# Altium PCB PCB.PcbDoc
Units mm, origin at the board's own origin, x right, y up, seen from the top; angles counter-clockwise.
Board outline 29.59 x 14.22 mm, 2 copper layers (Top Layer, Bottom Layer); 11 components, 11 nets, 48 pads, 8 vias.
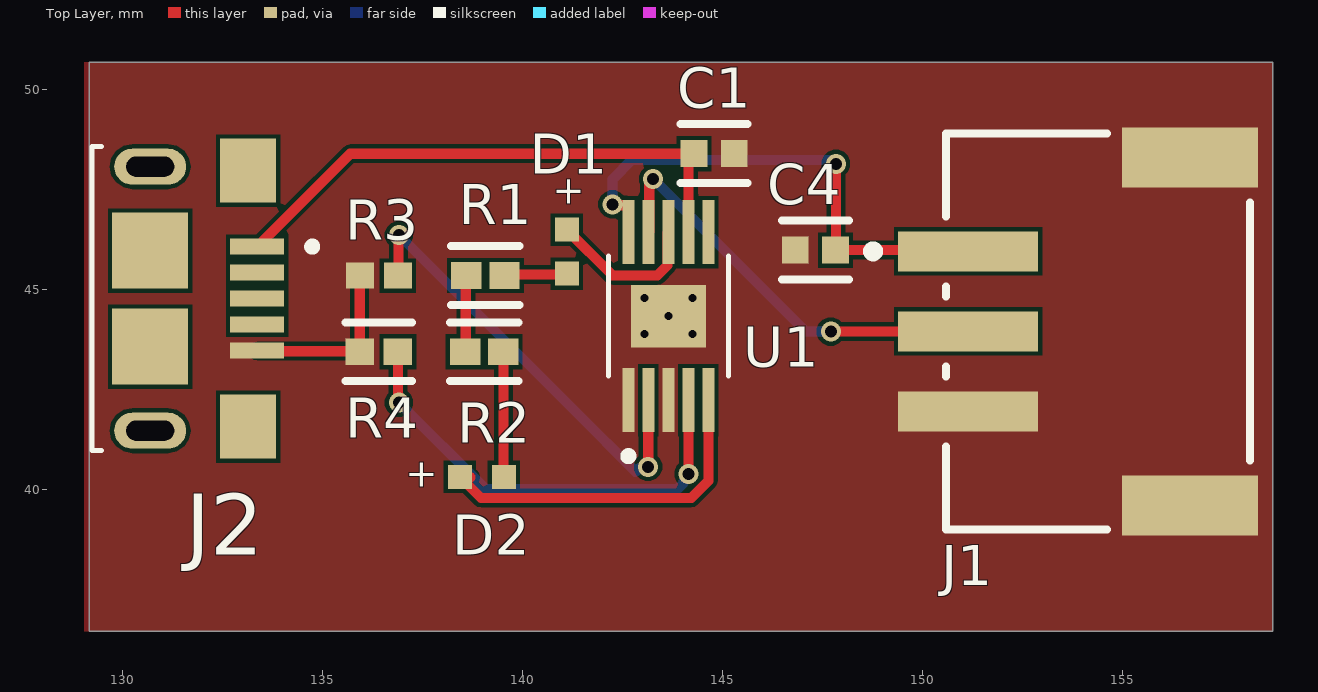
[diagram p0: Top Layer view]
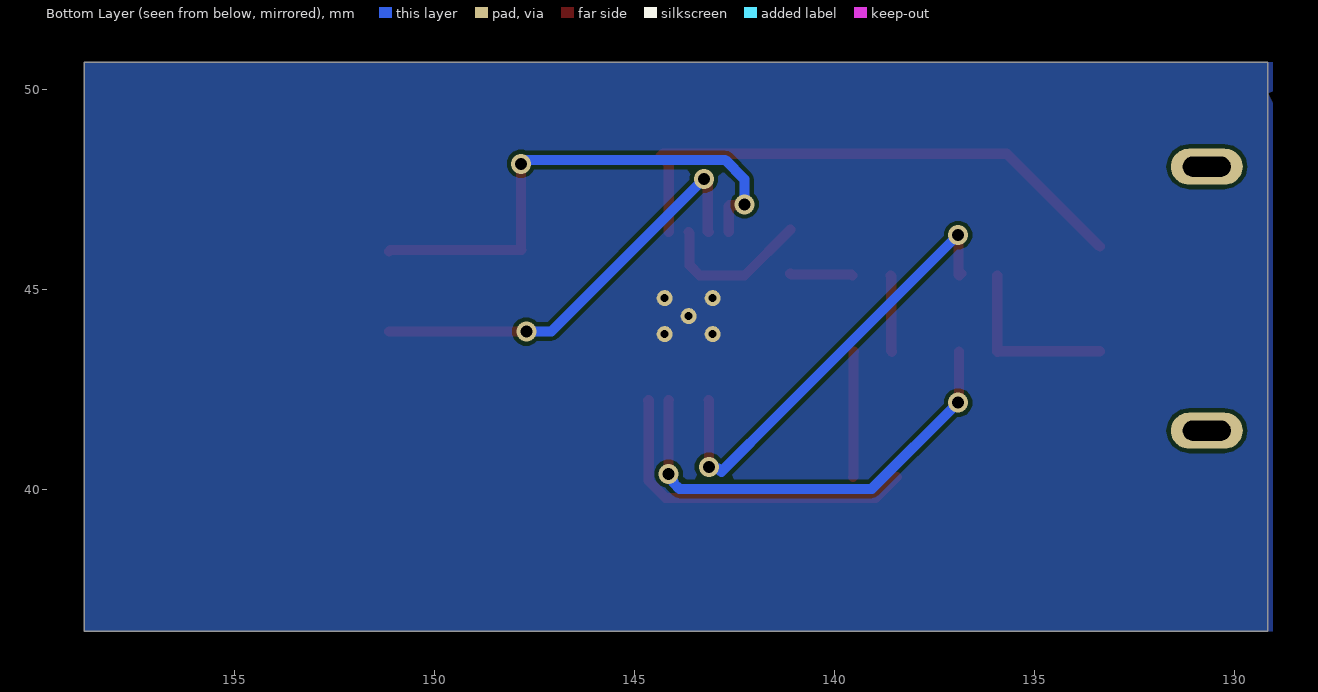
[diagram p1: Bottom Layer view, seen from below]
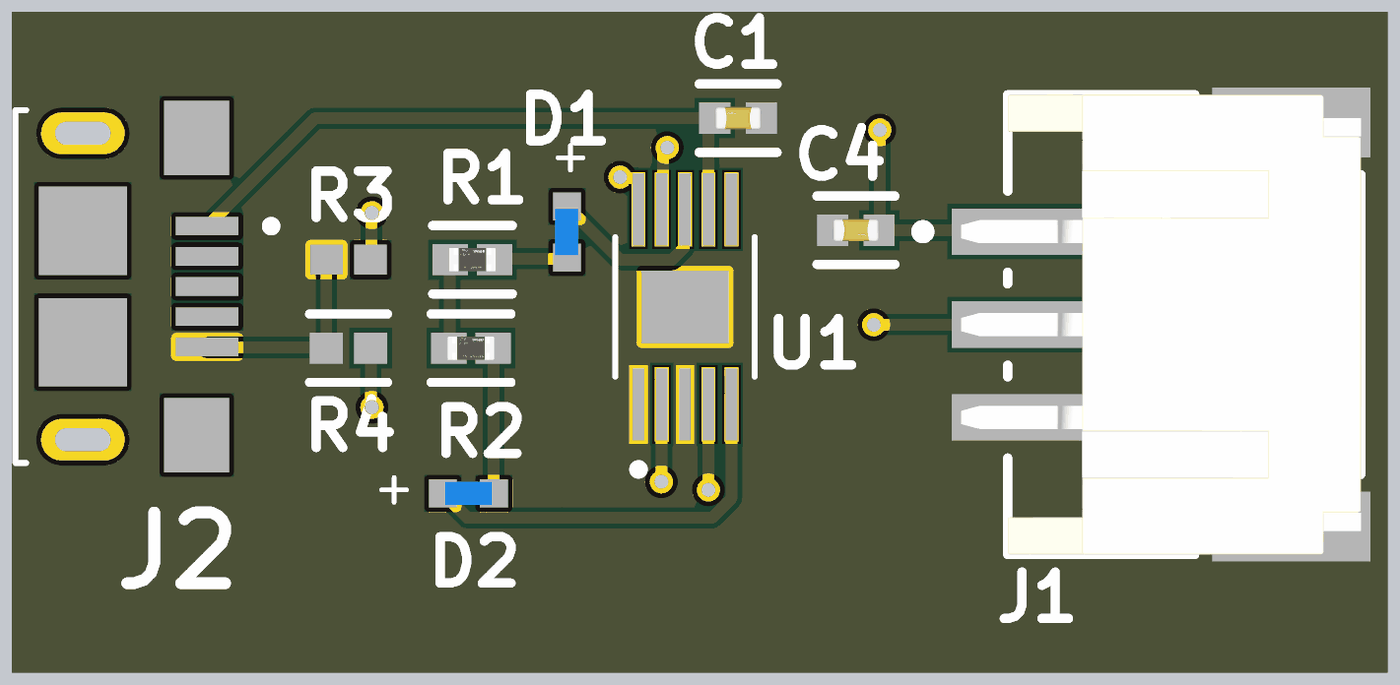
[diagram p2: 3D render of the assembled board from above, using the file's embedded part models]

## Layer stack, top to bottom
Top Solder: solder mask 0.0102, Solder Resist, Dk 3.5
Top Layer: signal copper 0.0356
Dielectric 1: dielectric 0.32, FR-4, Dk 4.8
Bottom Layer: signal copper 0.0356
Bottom Solder: solder mask 0.0102, Solder Resist, Dk 3.5

## Board outline
129.159,36.449 158.75,36.449 158.75,50.673 129.159,50.673

## Design rules (kind name [scope] priority, off if disabled: settings)
Clearance [All] p1: gap=0.1 ignorepadtopadclearanceinfootprint=TRUE
MinimumSolderMaskSliver [All] p1: minsoldermaskwidth=0.1
PolygonConnect [All] p1: connectstyle=Direct reliefconductorwidth=0.254 reliefentries=4 polygonreliefangle="90 Angle" airgapwidth=0.254
RoutingVias [All] p1: holewidth=0.711 width=1.27 viastyle="Through Hole" minholewidth=0.711 minwidth=1.27 maxholewidth=0.711 maxwidth=1.27
SilkToSilkClearance [All] p1: silktosilkclearance=0.15
SilkToSolderMaskClearance [IsPad] p1: minsilkscreentomaskgap=0.15 clearancetoexposedcopper=TRUE
SolderMaskExpansion [All] p1: expansion=0.102 istentingtop=FALSE
Width [All] p1: maxlimit=0.254 minlimit=0.254 preferedwidth=0.254
27 further rules are at their usual default settings.

## Components (designator, comment, footprint, x,y, rotation, side; value= is the part's Value field where it differs from the comment)
C1 "1u" 1U_0402_CAP 144.78,48.387 r180 top value=1uF
C4 "1u" 1U_0402_CAP 147.314,45.974 r0 top value=1uF
D1 "RED" RED_LED 141.097,45.974 r90 top
D2 "GREEN" GREEN_LED 138.938,40.259 r180 top
J1 "S3B-PH-SM4-TB(LF)(SN)" JST_3POS 154.38,43.942 r270 top
J2 "10118193-0001LF" USB_PWR_CTR 130.683,44.761 r270 top
R1 "1k5" 1K5_0402_RES 139.065,45.339 r0 top
R2 "1k5" 1K5_0402_RES 139.033,43.434 r0 top
R3 "1k" 1k_0402_RES 136.398,45.339 r0 top value=1kR
R4 "2k" 2K_0402_RES 136.398,43.434 r0 top value=2kR
U1 "BQ24095DGQT" BATT_CHARGE_IC 143.637,44.323 r90 top

## Footprints (in the part's own frame and the unit in brackets; to place one, negate y for a bottom-side part, rotate by r counter-clockwise, add the part's x,y. Pads: shape width x height; smd on the part's side, far side on the other; paste and mask are expansions set on the pad)
1K5_0402_RES [mm]
  rect 0.76x0.672 smd paste+0 mask+0: 1(-0.476,0) 2(0.476,0)
  silkscreen extent -0.86,-0.74 0.86,0.74, body extent -1.06,-0.54 1.06,0.54, height 0.25
1k_0402_RES [mm] "Chip Resistor, 2-Leads, Body 1.00x0.50mm, IPC Low Density"
  rect 0.7x0.65 smd: 1(-0.475,0) 2(0.475,0)
  body extent -0.53,-0.27 0.53,0.28, height 0.4
1U_0402_CAP [mm]
  rect 0.668x0.672 smd paste+0 mask+0: 1(-0.502,0) 2(0.502,0)
  silkscreen extent -0.84,-0.74 0.84,0.74, body extent -1.04,-0.54 1.04,0.54, height 0.25
2K_0402_RES [mm]
  rect 0.715x0.672 smd paste+0 mask+0: 1(-0.479,0) 2(0.479,0)
  silkscreen extent -0.84,-0.74 0.84,0.74
BATT_CHARGE_IC [mm]
  rect 1.6x0.3 smd paste-2 mask+0: 1(-2.1,1) 2(-2.1,0.5) 3(-2.1,0) 4(-2.1,-0.5) 5(-2.1,-1) 6(2.1,-1) 7(2.1,-0.5) 8(2.1,0) 9(2.1,0.5) 10(2.1,1)
  rect 1.57x1.88 smd: 11(0,0)
  round 0.4 hole 0.2 mask+0: 12(-0.45,0.6) 13(0.45,0.6) 14(0,0) 15(-0.45,-0.6) 16(0.45,-0.6)
  silkscreen extent -3.6,-1.5 1.5,1.5
GREEN_LED [mm]
  rect 0.6x0.6 smd: 1(-0.589,-0.046) 2(0.511,-0.046)
  body extent -0.54,-0.3 0.46,0.2, height 0.4
JST_3POS [mm]
  rect 1x3.5 smd paste+0 mask+0: 1(-2,-3.25) 2(0,-3.25) 3(2,-3.25)
  rect 1.5x3.4 smd paste+0 mask+0: 4(-4.35,2.3) 5(4.35,2.3)
  silkscreen extent -4.95,-5.75 4.95,3.8, body extent -4.95,-4.8 4.95,3.8, height 5.6
RED_LED [mm]
  rect 0.6x0.6 smd: 1(-0.589,0) 2(0.511,0)
  body extent -0.54,-0.25 0.46,0.25, height 0.4
USB_PWR_CTR [mm]
  rect 0.4x1.35 smd: 1(-1.3,2.675) 2(-0.65,2.675) 3(0,2.675) 4(0.65,2.675) 5(1.3,2.675)
  rect 1.6x1.4 smd: S1(-3.2,2.45) S2(3.2,2.45)
  rect 1.9x1.9 smd: S3(1.2,0) S4(-1.2,0)
  oval 0.9x1.8 hole 0.5 slot 1.2 at 90 deg: S5(-3.3,0) S6(3.3,0)
  silkscreen extent -3.8,-1.45 3.8,4.15

## Part data
C1 C4: library part CC0402KRX5R6BB105, "CAP CER 1UF 10V X5R 0402", Case Code (Imperial)=0402, Case Code (Metric)=1005, Dielectric=X5R, Manufacturer=Yageo, Max Operating Temperature=85°C, Min Operating Temperature=-55°C, Package Quantity=1, Supplier Part Number=311-1439-1-ND, Tolerance=10%, Voltage Rating=10V, Case/Package=0402, Category="Ceramic Capacitors", ComponentLink1Description=https://datasheet.ciiva.com/176/upy-gphc-x5r-4v-to-50v-12-176704.pdf?src-supplier=Digikey, ComponentLink1URL=https://datasheet.ciiva.com/176/upy-gphc-x5r-4v-to-50v-12-176704.pdf?src-supplier=Digikey, ComponentLink2Description=https://datasheet.ciiva.com/176/mlccorderingcode-176705.pdf?src-supplier=Digikey, ComponentLink2URL=https://datasheet.ciiva.com/176/mlccorderingcode-176705.pdf?src-supplier=Digikey, ComponentLink3Description=https://datasheet.ciiva.com/176/mlccorderingcode-176706.pdf?src-supplier=Digikey, ComponentLink3URL=https://datasheet.ciiva.com/176/mlccorderingcode-176706.pdf?src-supplier=Digikey, Construction=Flat, Depth=0.5mm, Dissipation Factor=15%, Halogen Free=5694HalogenFree, Height=0.5mm, Lead Free=5697LeadFree, Length=1mm, Manufacturer Part Number=CC0402KRX5R6BB105, Material=4241ConductorMaterial, Mounting Technology="Surface Mount", Packaging="Tape and Reel", Pins=2, Pricing="1=0.1, 10=0.07, 50=0.0418, 100=0.0329, 500=0.02428, 1000=0.0201, 2500=0.0187, 5000=0.01711 (USD)", Radiation Hardening=No, Reach SVHC Compliant=No, RoHS=Yes, RoHS Compliant=Yes, Series=CC, Stock=603752, Supplier=Digikey, Termination=SMD/SMT, Thickness=0.022inch, Voltage Rating (DC)=10V, Width=0.02inch
D1: library part 150040RS73240, "LED RED CLEAR 0402 SMD", Case Code (Imperial)=0402, Case Code (Metric)=1005, Color=Red, Forward Current=60mA, Forward Voltage=2V, Lens Color=Colorless, Manufacturer="Wurth Electronics", Max Operating Temperature=85°C, Max Reverse Voltage (DC)=5V, Min Operating Temperature=-40°C, Power Dissipation=72mW, Supplier Part Number=732-11991-1-ND, Test Current=20mA, Case/Package=0402, Category=LEDs, ComponentLink1Description=http://www.farnell.com/datasheets/2621636.pdf?src-supplier=Farnell, ComponentLink1URL=http://www.farnell.com/datasheets/2621636.pdf?src-supplier=Farnell, ComponentLink2Description=https://katalog.we-online.de/pbs/datasheet/150040RS73240.pdf?src-supplier=Digikey, ComponentLink2URL=https://katalog.we-online.de/pbs/datasheet/150040RS73240.pdf?src-supplier=Digikey, ComponentLink3Description=http://www.farnell.com/datasheets/2621636.pdf?src-supplier=Element14, ComponentLink3URL=http://www.farnell.com/datasheets/2621636.pdf?src-supplier=Element14, ComponentLink4Description=http://www.farnell.com/datasheets/2621636.pdf?src-supplier=Newark, ComponentLink4URL=http://www.farnell.com/datasheets/2621636.pdf?src-supplier=Newark, Dominant Wavelength=625nm, Height=0.5mm, Length=1mm, Lens Size=0.5mm, Lens Style=Flat, Lens Transparency=Clear, Luminous Intensity=100mcd, Manufacturer Part Number=150040RS73240, Mounting Technology="Surface Mount", Packaging="Cut Tape", Pricing="1=0.31, 10=0.271, 100=0.244, 500=0.217, 1000=0.191 (USD)", Reverse Voltage=5V, RoHS=Yes, RoHS Compliant=Yes, Series=WL-SMCC, Stock=16784, Supplier=Digikey, Viewing Angle=120°, Wavelength=625nm, Width=0.5mm
D2: library part 150040VS73240, "LED GREEN CLEAR 0402 SMD", Case Code (Imperial)=0402, Case Code (Metric)=1005, Color=Green, Forward Current=60mA, Forward Voltage=2V, Lens Color=Colorless, Manufacturer="Wurth Electronics", Max Operating Temperature=85°C, Max Reverse Voltage (DC)=5V, Min Operating Temperature=-40°C, Power Dissipation=75mW, Supplier Part Number=732-11992-1-ND, Test Current=20mA, Case/Package=0402, Category=LEDs, ComponentLink1Description=http://www.farnell.com/datasheets/2621637.pdf?src-supplier=Farnell, ComponentLink1URL=http://www.farnell.com/datasheets/2621637.pdf?src-supplier=Farnell, ComponentLink2Description=http://www.farnell.com/datasheets/2621637.pdf?src-supplier=Element14, ComponentLink2URL=http://www.farnell.com/datasheets/2621637.pdf?src-supplier=Element14, ComponentLink3Description=https://katalog.we-online.de/pbs/datasheet/150040VS73240.pdf?src-supplier=Digikey, ComponentLink3URL=https://katalog.we-online.de/pbs/datasheet/150040VS73240.pdf?src-supplier=Digikey, ComponentLink4Description=http://www.farnell.com/datasheets/2621637.pdf?src-supplier=Newark, ComponentLink4URL=http://www.farnell.com/datasheets/2621637.pdf?src-supplier=Newark, Dominant Wavelength=570nm, Height=0.5mm, Length=1mm, Lens Size=0.5mm, Lens Style=Flat, Lens Transparency=Clear, Luminous Intensity=50mcd, Manufacturer Part Number=150040VS73240, Mounting Technology="Surface Mount", Packaging="Cut Tape", Pricing="1=0.31, 10=0.271, 100=0.244, 500=0.217, 1000=0.191 (USD)", Reverse Voltage=5V, RoHS=Yes, RoHS Compliant=Yes, Series=WL-SMCC, Stock=23651, Supplier=Digikey, Viewing Angle=120°, Wavelength=570nm, Width=0.5mm
J1: "Connector Header, PH Series, 3 Position, Side Entry, 2.00mm, Solder, Surface Mount, Natural.", Color=Natural,White, Contact Resistance=10mR, Current Rating=2A, Flammability Rating="UL94 V-0", Housing Color=Beige, Insulation Color=Natural, Insulation Resistance=1GR, Manufacturer=JST, Max Operating Temperature=85°C, Max Voltage Rating (AC)=100V, Min Operating Temperature=-25°C, Supplier Part Number=9492623, Category="Headers and Wire Housings", ComponentLink1Description=https://datasheet.ciiva.com/11748/0900766b80df0d9d-11748720.pdf?src-supplier=Rs, ComponentLink1URL=https://datasheet.ciiva.com/11748/0900766b80df0d9d-11748720.pdf?src-supplier=Rs, ComponentLink2Description=https://datasheet.ciiva.com/16201/jst20s3b-ph-sm4-tb-lf-sn-16201903.pdf?src-supplier=Future+Electronics, ComponentLink2URL=https://datasheet.ciiva.com/16201/jst20s3b-ph-sm4-tb-lf-sn-16201903.pdf?src-supplier=Future+Electronics, ComponentLink3Description=https://datasheet.ciiva.com/712/eph-712555.pdf?src-supplier=Digikey, ComponentLink3URL=https://datasheet.ciiva.com/712/eph-712555.pdf?src-supplier=Digikey, ComponentLink4Description=https://datasheet.ciiva.com/712/eph-712554.pdf?src-supplier=Digikey, ComponentLink4URL=https://datasheet.ciiva.com/712/eph-712554.pdf?src-supplier=Digikey, ComponentLink5Description=https://datasheet.ciiva.com/712/eph-712556.pdf?src-supplier=Digikey, ComponentLink5URL=https://datasheet.ciiva.com/712/eph-712556.pdf?src-supplier=Digikey, ComponentLink6Description=https://datasheet.ciiva.com/8052/80594-8052219.pdf?src-supplier=Element14, ComponentLink6URL=https://datasheet.ciiva.com/8052/80594-8052219.pdf?src-supplier=Element14, ComponentLink7Description=https://datasheet.ciiva.com/22693/80594-22693485.pdf?src-supplier=Element14, ComponentLink7URL=https://datasheet.ciiva.com/22693/80594-22693485.pdf?src-supplier=Element14, Connector Type=Header, Contact Finish - Mating=TIN, Contact Material="Copper Alloy,Tin,Bronze,Brass", Contact Mating Length=0.13inch, Contact Plating=Tin,Copper, Contact Shape=Square, Contact Type="Male Pin", Depth=7.6mm, Fastening Type=Detent, Gender=Male, Height=9.4mm, Housing Material=Polyamide, Insulation Material=Nylon, Lead Free=5697LeadFree, Lead Pitch=2mm, Length=9.9mm, Manufacturer Part Number=S3B-PH-SM4-TB(LF)(SN), Material=Polyamide, Max Current Rating=2A, Max Voltage Rating (DC)=100V, Mounting Technology="Surface Mount", Number of Contacts=3, Number of Poles=3, Number of Positions=3, Number of Rows=1, Orientation="Right Angle", Packaging="Tape and Reel", Pitch=2mm, Pricing="10=0.409, 100=0.29, 500=0.246, 1000=0.215, 2500=0.2, 5000=0.187 (GBP)", Reach SVHC Compliant=No, RoHS=Yes, Series=PH, Stock=62261, Supplier=Farnell, Termination=Solder, Voltage Rating=100V, Voltage Rating (AC)=100V, Voltage Rating (DC)=100V, Weight=28.349523g, Width=5mm, Working Voltage=100V
J2: "CONN RCPT USB2.0 MICRO B SMD R/A", Color=Black, Current Rating=1.8A, Flammability Rating="UL94 V-0", Insulation Resistance=1GR, Manufacturer="Amphenol ICC / FCI", Max Operating Temperature=85°C, Max Voltage Rating (AC)=100V, Min Operating Temperature=-55°C, Package Quantity=1200, Supplier Part Number=609-4616-1-ND, Category=LDO, ComponentLink1Description=https://cdn.amphenol-icc.com/media/wysiwyg/files/documentation/datasheet/inputoutput/io_usb_micro.pdf?src-supplier=Arrow+Electronics, ComponentLink1URL=https://cdn.amphenol-icc.com/media/wysiwyg/files/documentation/datasheet/inputoutput/io_usb_micro.pdf?src-supplier=Arrow+Electronics, ComponentLink2Description=https://cdn.amphenol-icc.com/media/wysiwyg/files/documentation/datasheet/inputoutput/io_usb_micro.pdf?src-supplier=Onlinecomponents.com, ComponentLink2URL=https://cdn.amphenol-icc.com/media/wysiwyg/files/documentation/datasheet/inputoutput/io_usb_micro.pdf?src-supplier=Onlinecomponents.com, ComponentLink3Description=https://cdn.amphenol-icc.com/media/wysiwyg/files/documentation/datasheet/inputoutput/io_usb_micro.pdf?src-supplier=Verical, ComponentLink3URL=https://cdn.amphenol-icc.com/media/wysiwyg/files/documentation/datasheet/inputoutput/io_usb_micro.pdf?src-supplier=Verical, ComponentLink4Description=https://datasheet.octopart.com/10118193-0001LF-Amphenol-Communications-Solutions-datasheet-96019471.pdf?src-supplier=Element14, ComponentLink4URL=https://datasheet.octopart.com/10118193-0001LF-Amphenol-Communications-Solutions-datasheet-96019471.pdf?src-supplier=Element14, ComponentLink5Description=https://cdn.amphenol-icc.com/media/wysiwyg/files/documentation/datasheet/inputoutput/io_usb_micro.pdf?src-supplier=Avnet, ComponentLink5URL=https://cdn.amphenol-icc.com/media/wysiwyg/files/documentation/datasheet/inputoutput/io_usb_micro.pdf?src-supplier=Avnet, ComponentLink6Description=https://cdn.amphenol-icc.com/media/wysiwyg/files/documentation/datasheet/inputoutput/io_usb_micro.pdf?src-supplier=TTI, ComponentLink6URL=https://cdn.amphenol-icc.com/media/wysiwyg/files/documentation/datasheet/inputoutput/io_usb_micro.pdf?src-supplier=TTI, ComponentLink7Description=https://datasheet.octopart.com/10118193-0001LF-Amphenol-Communications-Solutions-datasheet-11792339.pdf?src-supplier=Electro+Sonic, ComponentLink7URL=https://datasheet.octopart.com/10118193-0001LF-Amphenol-Communications-Solutions-datasheet-11792339.pdf?src-supplier=Electro+Sonic, Connector Type=USB,Receptacle, Contact Material="Copper Alloy", Contact Plating=Gold, Depth=5.67mm, Features=Shielded, Gender=Female, Housing Material=Polymer, Length=7.86mm, Manufacturer Part Number=10118193-0001LF, Mounting Technology="Surface Mount,Horizontal", Number of Contacts=5, Number of Ports=1, Orientation="Right Angle", Packaging="Tape and Reel", Pins=5, Pitch=0.65mm, Pricing="1=0.57, 10=0.43, 25=0.3864, 50=0.3566, 100=0.3293, 250=0.29696, 500=0.27504 (USD)", Radiation Hardening=No, RoHS=No, Series=-, Stock=195868, Supplier=Digikey, Termination=Solder, Voltage Rating=100V
R1 R2: library part RT0402BRD071K5L, "RES SMD 1.5K OHM 0.1% 1/16W 0402", Manufacturer=Yageo, Supplier Part Number=YAG1380CT-ND, Category="Chip SMD Resistors", ComponentLink1Description=https://datasheet.ciiva.com/2582/pyu-rt-1-to-0-05-rohs-l-4-2582207.pdf?src-supplier=Digikey, ComponentLink1URL=https://datasheet.ciiva.com/2582/pyu-rt-1-to-0-05-rohs-l-4-2582207.pdf?src-supplier=Digikey, Manufacturer Part Number=RT0402BRD071K5L, Pricing="1=0.16, 10=0.121, 50=0.0958, 100=0.0859, 500=0.0654, 1000=0.0578, 5000=0.04283 (USD)", RoHS=Yes, Stock=28812, Supplier=Digikey
R3: library part RC0402JR-071KL, "RES 1K OHM 5% 1/16W 0402", Case Code (Imperial)=0402, Case Code (Metric)=1005, Manufacturer=Yageo, Max Operating Temperature=155°C, Max Power Dissipation=63mW, Min Operating Temperature=-55°C, Package Quantity=1, Power Rating=62.5mW, Resistance Tolerance=5%, Resistor Type="Thick Film", Supplier Part Number=311-1.0KJRCT-ND, Temperature Coefficient=100ppm/°C, Voltage Rating=50V, Case/Package=0402, Category="Chip SMD Resistors", Features="Moisture Resistant", Height=0.016inch, Lead Free=5697LeadFree, Length=0.039inch, Manufacturer Part Number=RC0402JR-071KL, Number of Terminations=2, Packaging="Cut Tape", Pricing="1=0.1, 10=0.018, 50=0.0102, 100=0.0083, 500=0.00528, 1000=0.00444, 5000=0.00307 (USD)", Reach SVHC Compliant=No, RoHS=Yes, RoHS Compliant=Yes, Series=RC, Stock=13704362, Supplier=Digikey, Termination=SMD/SMT, Tolerance=5%, Voltage Rating (AC)=50V, Width=0.02inch
R4: library part RC0402FR-072KL, "RES 2K OHM 1% 1/16W 0402", Case Code (Imperial)=0402, Case Code (Metric)=1005, Manufacturer=Yageo, Max Operating Temperature=155°C, Max Power Dissipation=63mW, Min Operating Temperature=-55°C, Package Quantity=1, Resistance Tolerance=1%, Resistor Type="Thick Film", Supplier Part Number=311-2KLRCT-ND, Temperature Coefficient=100ppm/°C, Voltage Rating=50V, Case/Package=0402, Category="Chip SMD Resistors", ComponentLink1Description=https://datasheet.ciiva.com/11808/0900766b80c66297-11808787.pdf?src-supplier=Rs, ComponentLink1URL=https://datasheet.ciiva.com/11808/0900766b80c66297-11808787.pdf?src-supplier=Rs, ComponentLink2Description=https://datasheet.ciiva.com/7849/1018594-7849934.pdf?src-supplier=Element14, ComponentLink2URL=https://datasheet.ciiva.com/7849/1018594-7849934.pdf?src-supplier=Element14, ComponentLink3Description=https://datasheet.ciiva.com/7849/1018594-7849935.pdf?src-supplier=Element14, ComponentLink3URL=https://datasheet.ciiva.com/7849/1018594-7849935.pdf?src-supplier=Element14, ComponentLink4Description=https://datasheet.ciiva.com/7983/1018594-7983517.pdf?src-supplier=Element14, ComponentLink4URL=https://datasheet.ciiva.com/7983/1018594-7983517.pdf?src-supplier=Element14, ComponentLink5Description=https://datasheet.ciiva.com/2453/pyu-r-int-thick-7-2453635.pdf?src-supplier=Digikey, ComponentLink5URL=https://datasheet.ciiva.com/2453/pyu-r-int-thick-7-2453635.pdf?src-supplier=Digikey, ComponentLink6Description=https://datasheet.ciiva.com/2453/pyu-r-int-thick-7-2453636.pdf?src-supplier=Digikey, ComponentLink6URL=https://datasheet.ciiva.com/2453/pyu-r-int-thick-7-2453636.pdf?src-supplier=Digikey, ComponentLink7Description=https://datasheet.ciiva.com/2453/pyu-r-int-thick-7-2453634.pdf?src-supplier=Digikey, ComponentLink7URL=https://datasheet.ciiva.com/2453/pyu-r-int-thick-7-2453634.pdf?src-supplier=Digikey, ComponentLink8Description=https://datasheet.ciiva.com/12667/pyu-rc0402-51-rohs-l-6-r-12667451.pdf?src-supplier=Mouser, ComponentLink8URL=https://datasheet.ciiva.com/12667/pyu-rc0402-51-rohs-l-6-r-12667451.pdf?src-supplier=Mouser, ComponentLink9Description=https://datasheet.ciiva.com/15189/getdatasheetpartid-358921-15189414.pdf?src-supplier=Verical, ComponentLink9URL=https://datasheet.ciiva.com/15189/getdatasheetpartid-358921-15189414.pdf?src-supplier=Verical, Construction=Rectangular, Depth=0.5mm, Features="Moisture Resistant", Height=0.016inch, Lead Free=5697LeadFree, Length=0.039inch, Manufacturer Part Number=RC0402FR-072KL, Military Standard=Not, Number of Terminations=2, Packaging="Tape and Reel", Power Rating=63mW, Pricing="1=0.1, 10=0.015, 50=0.0088, 100=0.0073, 500=0.00488, 1000=0.00417, 5000=0.00297, 10000=0.00261, 20000=0.00231, 30000=0.00216, 50000=0.00199, 100000=0.00179 (USD)", Reach SVHC Compliant=Unknown, RoHS=Yes, RoHS Compliant=Yes, Series=RC, Stock=2671664, Supplier=Digikey, Technology="THICK FILM", Termination=SMD/SMT, Tolerance=1%, Voltage Rating (DC)=50V, Width=0.02inch, Working Voltage=50V
U1: "IC BATT CHG LI-ION 1CELL 10MSOP", Manufacturer="Texas Instruments", Supplier Part Number=296-BQ24095DGQTCT-ND, Category="Battery Management", ComponentLink1Description=https://datasheet.ciiva.com/24110/slus968e-316287-24110136.pdf?src-supplier=Mouser, ComponentLink1URL=https://datasheet.ciiva.com/24110/slus968e-316287-24110136.pdf?src-supplier=Mouser, ComponentLink2Description=https://datasheet.ciiva.com/30000/bq24092-30000407.pdf?src-supplier=Avnet, ComponentLink2URL=https://datasheet.ciiva.com/30000/bq24092-30000407.pdf?src-supplier=Avnet, Manufacturer Part Number=BQ24095DGQT, Pricing="1=1.97, 10=1.766, 25=1.6664, 100=1.4199 (USD)", RoHS=Yes, Stock=275, Supplier=Digikey

## Via types
v1: diameter 0.5, hole 0.3, Top Layer to Bottom Layer, 8 vias

## Nets (pads, with @x,y where several pads share a name; then routed paths per layer and width w, separated by ;. In a path a pad name is that pad's centre, name@x,y a point inside that pad or via, vN(x,y) a via of type N, cw(c..) or ccw(c..) an arc to the next point about the centre after c; other vN are vias at no path point)
CHG: D1.2 U1.8 | length 3.9
  Top Layer w0.254: D1.2 142.243,45.339 143.361,45.339 143.614,45.592 143.614,46.4 U1.8
GND: C1.1 C4.1 J1.3 J1.4 J1.5 J2.5 R3.1 R4.1 U1.1 U1.3 U1.11 U1.12 U1.13 U1.14 U1.15 U1.16 | length 4.5
  Top Layer w0.254: J2.5@133.358,43.448 135.906,43.448 R4.1 135.921,43.436 135.921,45.337 R3.1
ISET: R3.2 U1.2 | length 11.5
  Top Layer w0.254: R3.2@136.82,45.392 R3.2 136.887,45.353 136.887,46.336 v1(136.902,46.351) ; v1(143.129,40.556) 143.133,40.56 143.133,42.219 U1.2
  Bottom Layer w0.254: v1(136.902,46.351) 141.34,41.913 142.82,40.433 142.896,40.509 143.082,40.509 v1(143.129,40.556)
NetD1_1: D1.1 R1.2 | length 1.6
  Top Layer w0.254: R1.2 139.564,45.362 141.074,45.362 D1.1
NetD2_1: D2.1 R2.2 | length 3.1
  Top Layer w0.254: R2.2 139.518,43.425 139.518,40.314 D2.1
PG: D2.2 U1.5 | length 8.7
  Top Layer w0.254: D2.2 138.954,39.778 144.212,39.778 144.637,40.203 U1.5 U1.5@144.646,42.214 ; D2.2@138.681,40.305 D2.2@138.691,40.295
TERM: R4.2 U1.4 | length 11.5
  Top Layer w0.254: R4.2 136.877,42.193 v1@136.906,42.164 ; U1.4 144.139,42.221 144.139,40.384 v1(144.141,40.382)
  Bottom Layer w0.254: v1(136.902,42.16) 139.057,40.005 143.869,40.005 144.018,40.154 144.018,40.192 144.141,40.315 v1(144.141,40.382)
TMP_SENSE: J1.2 U1.9 | length 10.8
  Top Layer w0.254: U1.9 143.16,46.446 143.16,47.589 143.256,47.685 v1(143.256,47.752) ; v1@147.701,43.942 J1.2
  Bottom Layer w0.254: v1(143.256,47.752) 147.066,43.942 147.693,43.942 v1(147.697,43.938)
VABTT: R1.1 R2.1 | length 1.9
  Top Layer w0.254: R2.1 138.573,43.45 138.573,45.323 R1.1
VBATT: C4.2 J1.1 U1.10 | length 13
  Top Layer w0.254: v1(142.24,47.117) 142.261,47.096 142.614,47.096 142.637,47.073 U1.10 ; C4.2 151.098,45.974 J1.1 ; C4.2@147.828,45.986 v1(147.828,48.133)
  Bottom Layer w0.254: v1(142.24,47.117) 142.245,47.122 142.245,47.748 142.726,48.229 147.665,48.229 147.761,48.133 v1(147.828,48.133)
VCC: C1.2 J2.1 U1.7 | length 14
  Top Layer w0.254: J2.1 135.682,48.385 144.28,48.385 144.34,48.325 144.137,48.123 U1.7
pads on no net: J2.2 J2.3 J2.4 J2.S1 J2.S2 J2.S3 J2.S4 J2.S5 J2.S6 U1.6

## Polygon pours and split planes (outlines as drawn)
GND on Bottom Layer "GND_L02_P001" (solid, remove dead copper, pour order 1): 129.159,49.911 129.032,49.784 129.032,36.449 158.75,36.449 158.75,50.673 129.032,50.673 129.032,49.657
GND on Top Layer "GND_L01_P002" (solid, remove dead copper, pour order 2): 129.032,50.673 129.032,36.449 158.75,36.449 158.75,50.673

## Text inside footprints (layer, text, board x,y; h text height)
D1: Top Overlay "+" at 141.447,47.035 h0.7 r90
D2: Top Overlay "+" at 137.877,40.655 h0.7 r180
J2: Top 3D Body "PCB END" at 129.483,39.911 h0.41 r270